# EAGLE board 5_8GHzRadar (EAGLE 9.6.2)
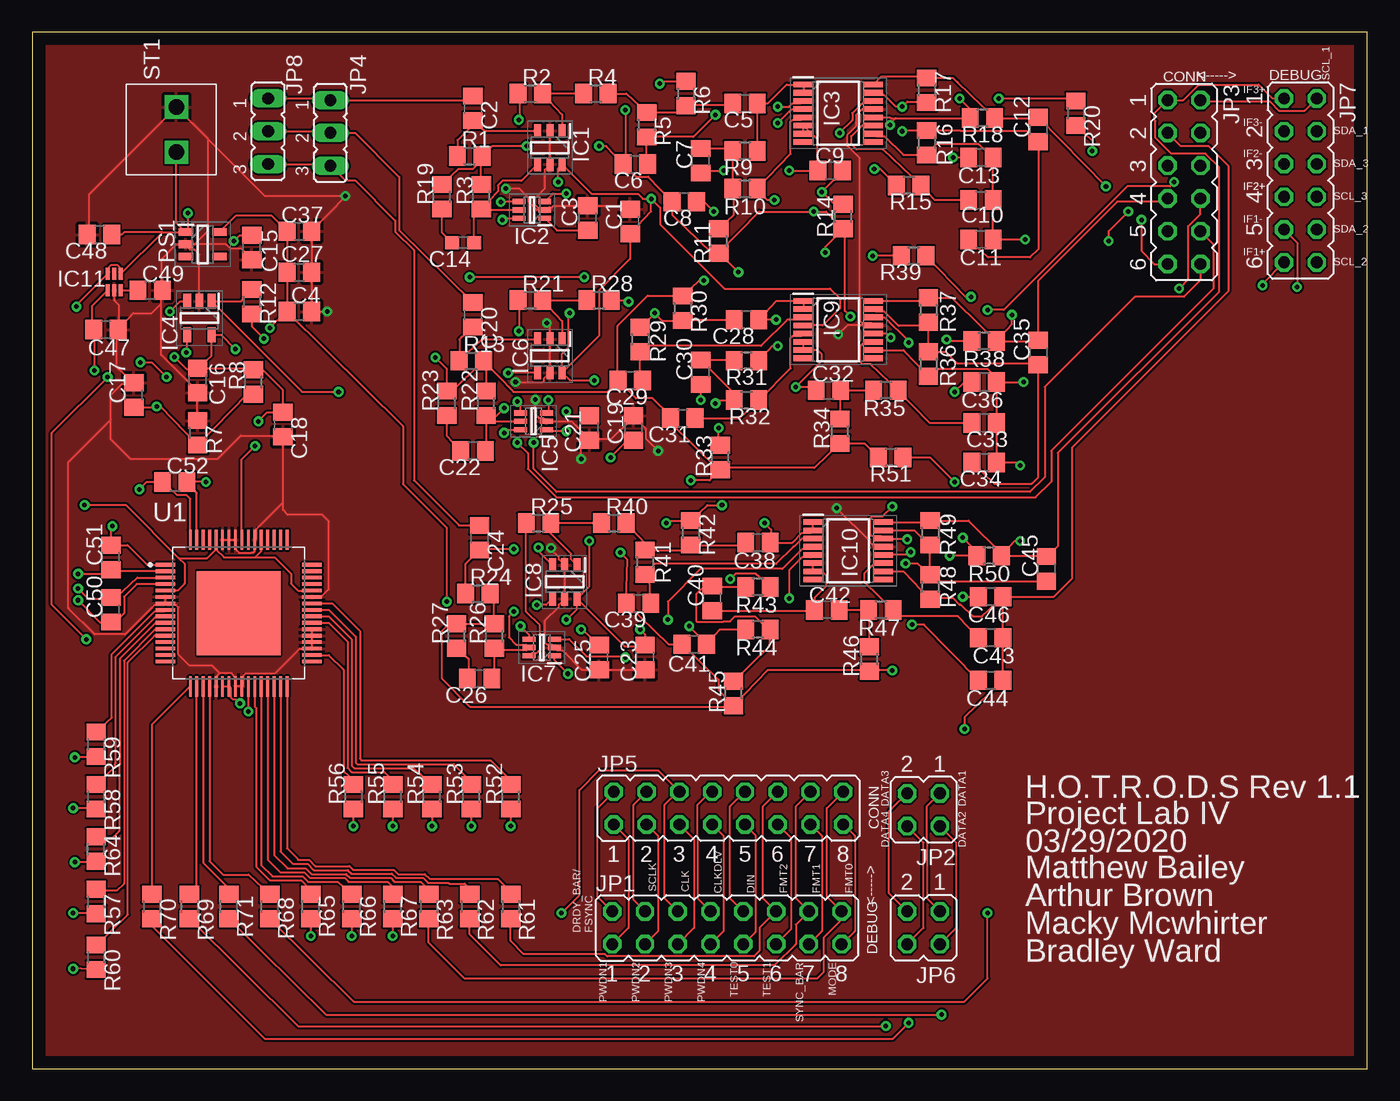
[diagram p0: board, top side]
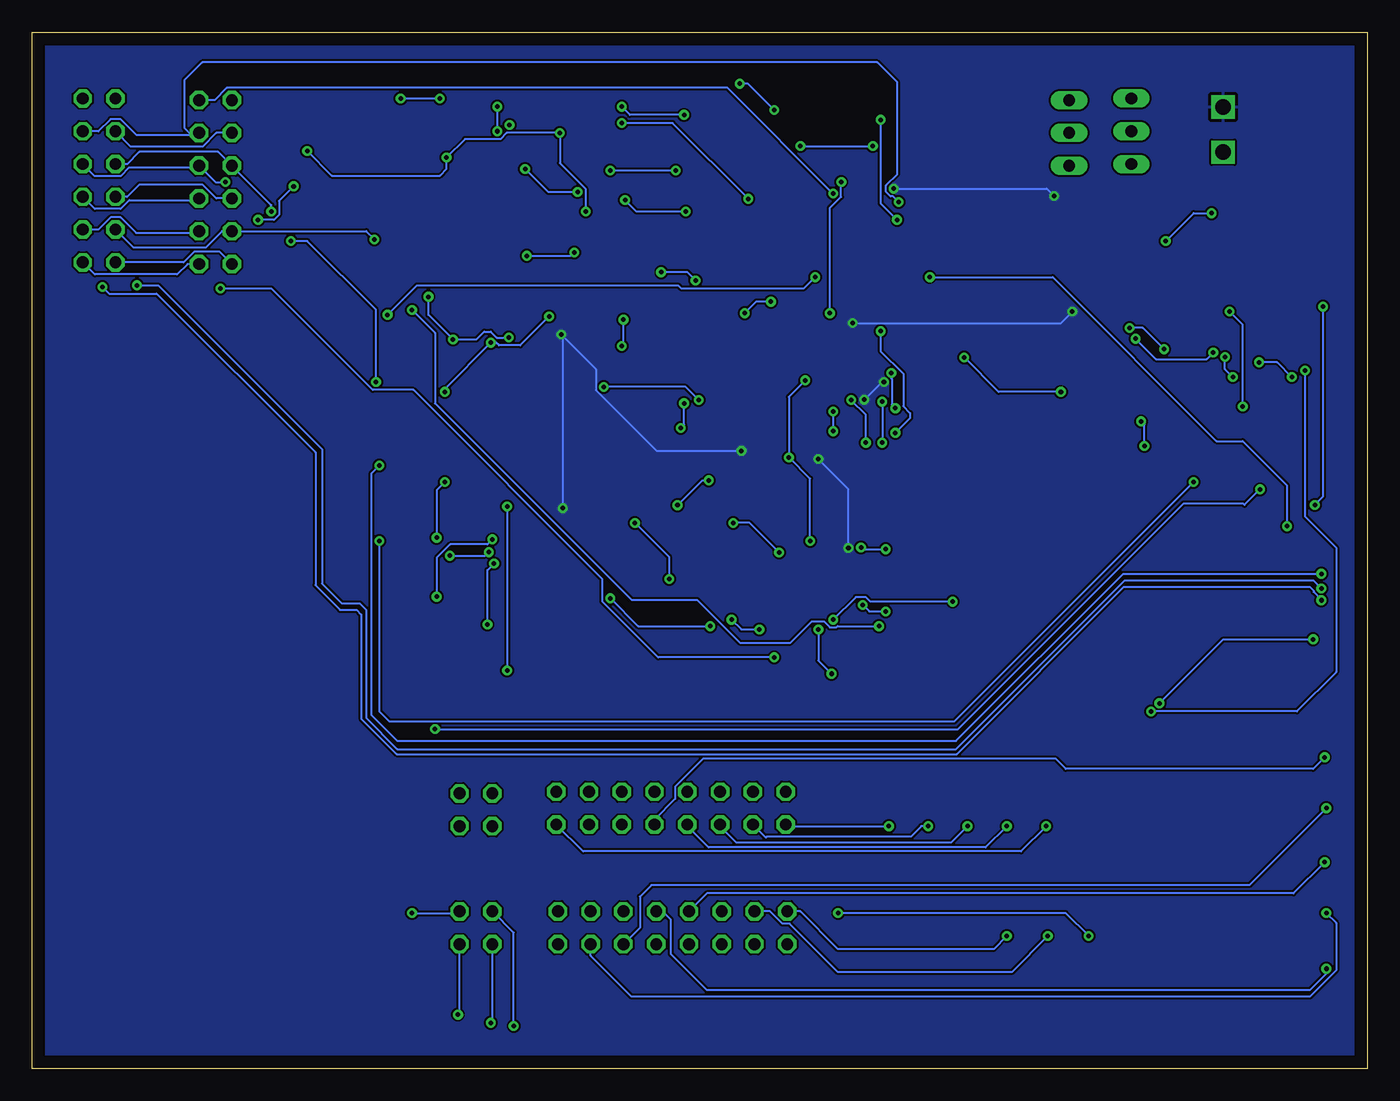
[diagram p1: board, bottom side, seen from below]

Size 103.48 x 80.31 mm. Coordinates in mm from the lower left corner, seen from the top.
Outline: 0,0 103.48,0 103.48,80.31 0,80.31 0,0
Copper layers (1*16): Top 0.035mm / dielectric 1.5mm / Bottom 0.035mm
Design rules "default": minimum track width 6mil, minimum drill 0.35mm, track to track 6mil, track to pad 6mil, pad to pad 6mil, via to via 6mil, smd to smd 6mil, copper to edge 40mil, drill to drill 6mil, minimum pad ring 10mil, minimum via ring 8mil, stop-mask expansion 4mil, vias tented up to drill 0mil, thermal gap 10mil

## Footprints (pad centres in the part's own frame; a part is rotated, then mirrored left to right if it is on the bottom)
C0805 = smd 1.3 x 1.5: 1 -0.95,0; 2 0.95,0
C0603 = smd 1.1 x 1: 1 -0.85,0; 2 0.85,0
SOT95P280X100-6N = smd 1.05 x 0.55: 1 -1.3,0.95; 2 -1.3,0; 3 -1.3,-0.95; 4 1.3,-0.95; 5 1.3,0; 6 1.3,0.95
SOT65P210X110-6N = smd 1 x 0.4: 1 -1,0.65; 2 -1,0; 3 -1,-0.65; 4 1,-0.65; 5 1,0; 6 1,0.65
SOP64P601X175-16N = smd 1.526 x 0.435: 1 -2.712,2.222; 2 -2.712,1.588; 3 -2.712,0.952; 4 -2.712,0.318; 5 -2.712,-0.318; 6 -2.712,-0.952; 7 -2.712,-1.588; 8 -2.712,-2.222; 9 2.712,-2.222; 10 2.712,-1.588; 11 2.712,-0.952; 12 2.712,-0.318; 13 2.712,0.318; 14 2.712,0.952; 15 2.712,1.588; 16 2.712,2.222
SOT95P280X145-5N = smd 1.15 x 0.6: 1 -1.3,0.95; 2 -1.3,0; 3 -1.3,-0.95; 4 1.3,-0.95; 5 1.3,0.95
SON50P150X150X80-6N = smd 0.914 x 0.305: 1 -0.635,0.508; 2 -0.635,0; 3 -0.635,-0.508; 4 0.635,-0.508; 5 0.635,0; 6 0.635,0.508
JP8Q = drill 0.914 octagon: 1 -8.89,-1.27; 2 -8.89,1.27; 3 -6.35,-1.27; 4 -6.35,1.27; 5 -3.81,-1.27; 6 -3.81,1.27; 7 -1.27,-1.27; 8 -1.27,1.27; 9 1.27,-1.27; 10 1.27,1.27; 11 3.81,-1.27; 12 3.81,1.27; 13 6.35,-1.27; 14 6.35,1.27; 15 8.89,-1.27; 16 8.89,1.27
JP2Q = drill 0.914 octagon: 1 -1.27,-1.27; 2 -1.27,1.27; 3 1.27,-1.27; 4 1.27,1.27
JP6Q = drill 0.914 octagon: 1 -6.35,-1.27; 2 -6.35,1.27; 3 -3.81,-1.27; 4 -3.81,1.27; 5 -1.27,-1.27; 6 -1.27,1.27; 7 1.27,-1.27; 8 1.27,1.27; 9 3.81,-1.27; 10 3.81,1.27; 11 6.35,-1.27; 12 6.35,1.27
JP2 = drill 0.914 long: 1 -2.54,0; 2 0,0; 3 2.54,0
R0805 = smd 1.3 x 1.5: 1 -0.95,0; 2 0.95,0
PHEONIX_SCREW(2) = drill 1.2 square: 1 -1.75,0; 2 1.75,0
QFP50P1200X1200X120-65N = smd 1.56 x 0.28: 1 -5.68,3.75; 2 -5.68,3.25; 3 -5.68,2.75; 4 -5.68,2.25; 5 -5.68,1.75; 6 -5.68,1.25; 7 -5.68,0.75; 8 -5.68,0.25; 9 -5.68,-0.25; 10 -5.68,-0.75; 11 -5.68,-1.25; 12 -5.68,-1.75; 13 -5.68,-2.25; 14 -5.68,-2.75; 15 -5.68,-3.25; 16 -5.68,-3.75; 33 5.68,-3.75; 34 5.68,-3.25; 35 5.68,-2.75; 36 5.68,-2.25; 37 5.68,-1.75; 38 5.68,-1.25; 39 5.68,-0.75; 40 5.68,-0.25; 41 5.68,0.25; 42 5.68,0.75; 43 5.68,1.25; 44 5.68,1.75; 45 5.68,2.25; 46 5.68,2.75; 47 5.68,3.25; 48 5.68,3.75 | smd 0.28 x 1.56: 17 -3.75,-5.68; 18 -3.25,-5.68; 19 -2.75,-5.68; 20 -2.25,-5.68; 21 -1.75,-5.68; 22 -1.25,-5.68; 23 -0.75,-5.68; 24 -0.25,-5.68; 25 0.25,-5.68; 26 0.75,-5.68; 27 1.25,-5.68; 28 1.75,-5.68; 29 2.25,-5.68; 30 2.75,-5.68; 31 3.25,-5.68; 32 3.75,-5.68; 49 3.75,5.68; 50 3.25,5.68; 51 2.75,5.68; 52 2.25,5.68; 53 1.75,5.68; 54 1.25,5.68; 55 0.75,5.68; 56 0.25,5.68; 57 -0.25,5.68; 58 -0.75,5.68; 59 -1.25,5.68; 60 -1.75,5.68; 61 -2.25,5.68; 62 -2.75,5.68; 63 -3.25,5.68; 64 -3.75,5.68 | smd 6.5 x 6.5: 65 0,0

## Placement (x,y rotation side)
C1  100n  [C0805]  46.35,65.66 90 top
C2  10u  [C0805]  34.16,74.42 270 top
C3  100n  [C0805]  43.05,65.91 90 top
C4  100n  [C0805]  20.7,58.67 0 top
C5  11n  [C0805]  55.24,74.8 180 top
C6  1.1n  [C0805]  46.74,70.1 180 top
C7  11n  [C0805]  51.82,70.36 90 top
C8  1.1n  [C0805]  50.55,67.18 180 top
C9  2.2u  [C0805]  61.85,69.6 0 top
C10  10p  [C0805]  73.53,67.31 0 top
C11  10p  [C0805]  73.53,64.26 180 top
C12  10p  [C0805]  77.98,72.77 90 top
C13  10p  [C0805]  73.53,70.61 180 top
C14  44u  [C0603]  33.4,64.01 180 top
C15  1u  [C0805]  17.02,63.63 270 top
C16  2.2u  [C0805]  12.83,53.34 270 top
C17  100n  [C0805]  7.87,52.2 90 top
C18  100n  [C0805]  19.43,49.91 270 top
C19  100n  [C0805]  46.61,49.66 90 top
C20  10u  [C0805]  34.16,58.42 270 top
C21  100n  [C0805]  43.18,49.66 270 top
C22  44u  [C0805]  34.16,47.88 180 top
C23  100n  [C0805]  47.5,31.88 270 top
C24  10u  [C0805]  34.67,41.15 270 top
C25  100n  [C0805]  43.94,31.88 270 top
C26  44u  [C0805]  34.67,30.23 180 top
C27  100n  [C0805]  20.7,61.72 0 top
C28  11n  [C0805]  55.37,58.04 180 top
C29  1.1n  [C0805]  46.35,53.34 180 top
C30  11n  [C0805]  51.82,53.97 90 top
C31  1.1n  [C0805]  50.42,50.42 180 top
C32  2.2u  [C0805]  61.72,52.58 0 top
C33  10p  [C0805]  73.79,50.04 0 top
C34  10p  [C0805]  73.79,46.99 180 top
C35  10p  [C0805]  77.98,55.5 90 top
C36  10p  [C0805]  73.79,53.21 180 top
C37  100n  [C0805]  20.7,64.9 0 top
C38  11n  [C0805]  56.26,40.77 180 top
C39  1.1n  [C0805]  46.99,36.07 180 top
C40  11n  [C0805]  52.7,36.45 90 top
C41  1.1n  [C0805]  51.31,32.89 180 top
C42  2.2u  [C0805]  61.59,35.56 0 top
C43  10p  [C0805]  74.3,33.4 0 top
C44  10p  [C0805]  74.3,30.1 180 top
C45  10p  [C0805]  78.61,38.73 90 top
C46  10p  [C0805]  74.3,36.58 180 top
C47  1u  [C0805]  5.71,57.28 0 top
C48  1u  [C0805]  5.21,64.64 180 top
C49  .01u  [C0805]  9.14,60.33 0 top
C50  2.2n  [C0805]  6.1,35.56 90 top
C51  2.2n  [C0805]  6.1,39.62 90 top
C52  2.2n  [C0805]  11.05,45.47 0 top
IC1  LT6230CS6#TRMPBF  [SOT95P280X100-6N]  40.13,71.37 270 top
IC2  MCP4017T-104E_LT  [SOT65P210X110-6N]  38.73,66.55 180 top
IC3  LTC6242HVCGN#PBF  [SOP64P601X175-16N]  62.48,74.04 0 top
IC4  TS461CLT  [SOT95P280X145-5N]  12.95,58.17 270 top
IC5  MCP4017T-104E_LT  [SOT65P210X110-6N]  38.86,50.16 180 top
IC6  LT6230CS6#TRMPBF  [SOT95P280X100-6N]  40.13,55.25 270 top
IC7  MCP4017T-104E_LT  [SOT65P210X110-6N]  39.5,32.64 180 top
IC8  LT6230CS6#TRMPBF  [SOT95P280X100-6N]  41.27,37.72 270 top
IC9  LTC6242HVCGN#PBF  [SOP64P601X175-16N]  62.48,57.28 0 top
IC10  LTC6242HVCGN#PBF  [SOP64P601X175-16N]  63.25,40.13 0 top
IC11  TPS717185DSER  [SON50P150X150X80-6N]  6.35,60.96 90 top
JP1  [JP8Q]  53.85,10.92 0 top
JP2  [JP2Q]  69.09,20.07 180 top
JP3  [JP6Q]  89.28,68.71 270 top
JP4  [JP2]  23.11,72.52 270 top
JP5  [JP8Q]  53.98,20.19 0 top
JP6  [JP2Q]  69.09,10.92 180 top
JP7  [JP6Q]  98.3,68.83 270 top
JP8  [JP2]  18.29,72.64 270 top
PS1  TPS70918DBVT  [SOT95P280X145-5N]  13.21,63.88 0 top
R1  4.7k  [R0805]  33.91,70.74 0 top
R2  1k  [R0805]  38.61,75.56 0 top
R3  1.5k  [R0805]  34.8,67.56 90 top
R4  1.61k  [R0805]  43.69,75.56 0 top
R5  5.77k  [R0805]  47.62,73.15 270 top
R6  NOP  [R0805]  50.67,75.56 270 top
R7  47k  [R0805]  12.83,49.28 270 top
R8  47k  [R0805]  17.14,53.21 90 top
R9  538  [R0805]  55.24,71.12 180 top
R10  17.3k  [R0805]  55.24,68.2 0 top
R11  NOP  [R0805]  53.21,64.13 90 top
R12  1k  [R0805]  17.02,59.44 270 top
R13  4.7k  [R0805]  34.04,54.86 0 top
R14  10k  [R0805]  62.87,66.04 90 top
R15  200k  [R0805]  67.94,68.45 180 top
R16  4.99k  [R0805]  69.34,71.75 270 top
R17  4.99k  [R0805]  69.34,75.82 270 top
R18  200k  [R0805]  73.66,73.66 180 top
R19  50  [R0805]  31.75,67.56 90 top
R20  NOP  [R0805]  80.9,74.04 270 top
R21  1k  [R0805]  38.61,59.56 0 top
R22  1.5k  [R0805]  35.18,51.56 90 top
R23  50  [R0805]  32.13,51.56 90 top
R24  4.7k  [R0805]  34.54,36.83 0 top
R25  1k  [R0805]  39.24,42.29 0 top
R26  1.5k  [R0805]  35.81,33.53 90 top
R27  50  [R0805]  32.89,33.53 90 top
R28  1.61k  [R0805]  43.94,59.56 0 top
R29  5.77k  [R0805]  47.12,56.52 270 top
R30  NOP  [R0805]  50.42,58.93 270 top
R31  538  [R0805]  55.37,54.86 180 top
R32  17.3k  [R0805]  55.37,51.82 0 top
R33  NOP  [R0805]  53.34,47.37 90 top
R34  10k  [R0805]  62.61,49.4 90 top
R35  200k  [R0805]  66.17,52.58 180 top
R36  4.99k  [R0805]  69.47,54.61 270 top
R37  4.99k  [R0805]  69.47,58.8 270 top
R38  200k  [R0805]  73.79,56.39 180 top
R39  NOP  [R0805]  68.33,62.99 180 top
R40  1.61k  [R0805]  45.09,42.29 0 top
R41  5.77k  [R0805]  47.5,39.24 270 top
R42  NOP  [R0805]  51.05,41.53 270 top
R43  538  [R0805]  56.26,37.34 180 top
R44  17.3k  [R0805]  56.26,34.04 180 top
R45  NOP  [R0805]  54.36,29.08 90 top
R46  10k  [R0805]  64.9,31.75 90 top
R47  200k  [R0805]  65.79,35.56 180 top
R48  4.99k  [R0805]  69.6,37.34 270 top
R49  4.99k  [R0805]  69.6,41.53 270 top
R50  200k  [R0805]  74.17,39.75 180 top
R51  NOP  [R0805]  66.55,47.37 180 top
R52  50  [R0805]  37.08,21.08 90 top
R53  50  [R0805]  34.04,21.08 90 top
R54  50  [R0805]  30.99,21.08 90 top
R55  50  [R0805]  27.94,21.08 90 top
R56  50  [R0805]  24.89,21.08 270 top
R57  50  [R0805]  4.95,12.95 270 top
R58  50  [R0805]  4.95,21.08 270 top
R59  50  [R0805]  4.95,25.15 270 top
R60  50  [R0805]  4.95,8.64 270 top
R61  50  [R0805]  37.08,12.57 270 top
R62  50  [R0805]  33.91,12.57 270 top
R63  50  [R0805]  30.73,12.57 270 top
R64  50  [R0805]  4.95,17.02 90 top
R65  50  [R0805]  21.59,12.57 90 top
R66  50  [R0805]  24.77,12.57 90 top
R67  50  [R0805]  27.94,12.57 90 top
R68  50  [R0805]  18.41,12.57 90 top
R69  50  [R0805]  12.19,12.57 270 top
R70  50  [R0805]  9.27,12.57 270 top
R71  50  [R0805]  15.24,12.57 90 top
ST1  PHOENIX_ST(2)  [PHEONIX_SCREW(2)]  11.18,72.77 90 top
U1  ADS1174IPAPT  [QFP50P1200X1200X120-65N]  16,35.31 0 top

## Library data of the parts
C1-C52 = rcl; SPICEPREFIX: C
IC1 IC6 IC8 = SamacSys_Parts; DESCRIPTION: LT6230 215MHz ULN SOT23 op amp Linear Technology LT6230CS6#TRMPBF Operational Amplifier, 200MHz Rail-Rail, 12 V, 5 V, 9 V, 6-Pin TSOT-23; HEIGHT: 1mm; MANUFACTURER_NAME: Linear Technology; MANUFACTURER_PART_NUMBER: LT6230CS6#TRMPBF; MOUSER_PART_NUMBER: 584-LT6230CS6#TRMPBF; MOUSER_PRICE-STOCK: https://www.mouser.com/Search/Refine.aspx?Keyword=584-LT6230CS6%23TRMPBF; RS_PART_NUMBER: 5061202P; RS_PRICE-STOCK: http://uk.rs-online.com/web/p/products/5061202P
IC2 IC5 IC7 = SamacSys_Parts; DESCRIPTION: MCP4017T-104E/LT, Digital Potentiometer 100k 128-Position Linear Serial-I2C 6-Pin SC-70; HEIGHT: 1.1mm; MANUFACTURER_NAME: Microchip; MANUFACTURER_PART_NUMBER: MCP4017T-104E/LT; MOUSER_PART_NUMBER: 579-MCP4017T104E/LT; MOUSER_PRICE-STOCK: https://www.mouser.com/Search/Refine.aspx?Keyword=579-MCP4017T104E%2FLT; RS_PART_NUMBER: 7386799P; RS_PRICE-STOCK: http://uk.rs-online.com/web/p/products/7386799P
IC3 IC9 IC10 = SamacSys_Parts; DESCRIPTION: LINEAR TECHNOLOGY - LTC6242HVCGN#PBF - IC, OP AMP, 18MHZ R/R, SMD, SSOP16; HEIGHT: 1.75mm; MANUFACTURER_NAME: Linear Technology; MANUFACTURER_PART_NUMBER: LTC6242HVCGN#PBF; MOUSER_PART_NUMBER: 584-LTC6242HVCGN#PBF; MOUSER_PRICE-STOCK: https://www.mouser.com/Search/Refine.aspx?Keyword=584-LTC6242HVCGN%23PBF
IC4 = SamacSys_Parts; ALLIED_NUMBER: 70521210; ALLIED_PRICE-STOCK: http://www.alliedelec.com/stmicroelectronics-ts461clt/70521210/; HEIGHT: 1.45mm; MANUFACTURER_NAME: STMicroelectronics; MANUFACTURER_PART_NUMBER: TS461CLT; MOUSER_PART_NUMBER: 511-TS461CL; MOUSER_PRICE-STOCK: https://www.mouser.com/Search/Refine.aspx?Keyword=511-TS461CL; RS_PART_NUMBER: 7958505P; RS_PRICE-STOCK: http://uk.rs-online.com/web/p/products/7958505P
IC11 = SamacSys_Parts; DESCRIPTION: 150mA, High PSRR, Low Quiescent Current, Low Noise LDO; HEIGHT: mm; MANUFACTURER_NAME: Texas Instruments; MANUFACTURER_PART_NUMBER: TPS717185DSER; MOUSER_PART_NUMBER: 595-TPS717185DSER; MOUSER_PRICE-STOCK: https://www.mouser.com/Search/Refine.aspx?Keyword=595-TPS717185DSER
JP1-JP8 = jumper
PS1 = SamacSys_Parts; DESCRIPTION: 150-mA 30-V ultra-low-Iq wide-input low-dropout (LDO) regulator with reverse current protection; HEIGHT: 1.45mm; MANUFACTURER_NAME: Texas Instruments; MANUFACTURER_PART_NUMBER: TPS70918DBVT; MOUSER_PART_NUMBER: 595-TPS70918DBVT; MOUSER_PRICE-STOCK: https://www.mouser.com/Search/Refine.aspx?Keyword=595-TPS70918DBVT; RS_PART_NUMBER: 8123849P; RS_PRICE-STOCK: http://uk.rs-online.com/web/p/products/8123849P
R1-R71 = rcl; SPICEPREFIX: R
ST1 = ProjectLab3GavinsParts
U1 = ADS1174IPAPT; AVAILABILITY: Unavailable; DESCRIPTION: 16 Bit Analog to Digital Converter 4 Input 1 Sigma-Delta 64-HTQFP _10x10_; MF: Texas Instruments; MP: ADS1174IPAPT; PACKAGE: HTQFP-64 Texas Instruments; PRICE: None

## Nets
0: C1.2 C3.2 C4.2 C15.2 C16.2 C17.2 C18.2 C19.2 C21.2 C23.2 C25.2 C27.2 C37.2 C47.2 C48.2 C49.2 IC1.2 IC1.5 IC2.2 IC3.13 IC4.2 IC5.2 IC6.2 IC6.5 IC7.2 IC8.2 IC8.5 IC9.13 IC10.13 IC11.2 PS1.2 R7.1 ST1.2 U1.6 U1.7 U1.21 U1.24 U1.25 U1.35 U1.36 U1.37 U1.38 U1.43 U1.54 U1.57 U1.58 U1.59
1V8: C47.1 IC11.1 U1.26
3V3A: C1.1 C4.1 C16.1 C18.1 C19.1 C23.1 C27.1 C37.1 IC1.6 IC3.4 IC4.5 IC6.6 IC8.6 IC9.4 IC10.4 PS1.5 R8.2 U1.22 U1.23 U1.56
5V: C15.1 C48.1 IC11.4 IC11.6 PS1.1 ST1.1 U1.5 U1.44 U1.53 U1.60
CLK: R65.2 U1.27
CLKDLV: R64.2 U1.10
DATA1: R68.2 U1.20
DATA2: R71.2 U1.19
DATA3: R69.1 U1.18
DATA4: R70.1 U1.17
DIN: R60.1 U1.12
DRDY_BAR/FSYNC: R67.2 U1.29
EXP_PAD: U1.65
FILTER1: C5.1 IC3.1 IC3.2 R9.1
FILTER2: C28.1 IC9.1 IC9.2 R31.1
FILTER3: C38.1 IC10.1 IC10.2 R43.1
FMT0: R61.1 U1.32
FMT1: R62.1 U1.31
FMT2: R63.1 U1.30
I2C_SCL_1: IC2.3 JP3.2 JP7.2
I2C_SCL_2: IC5.3 JP3.12 JP7.12
I2C_SCL_3: IC7.3 JP3.8 JP7.8
I2C_SDA_1: IC2.4 JP3.4 JP7.4
I2C_SDA_2: IC5.4 JP3.10 JP7.10
I2C_SDA_3: IC7.4 JP3.6 JP7.6
MODE: R56.1 U1.34
N$1: C14.1 IC1.4 IC2.5 R3.1
N$2: C2.2 IC1.3 R1.1
N$3: C5.2 R4.2 R5.1 R6.2
N$4: IC2.6 R2.1
N$5: C3.1 IC2.1
N$6: C9.2 R14.2 R15.2
N$7: C6.1 IC3.3 R5.2
N$8: C17.1 IC4.3 R7.2 R8.1
N$9: C7.2 R9.2 R10.1 R11.2
N$10: C22.1 IC5.5 IC6.4 R22.1
N$11: C8.1 IC3.5 R10.2
N$12: C7.1 C9.1 IC3.6 IC3.7
N$13: C10.1 IC3.11 R15.1
N$14: C14.2 R19.1
N$15: IC3.12 R18.2 R20.1
N$16: C20.2 IC6.3 R13.1
N$17: IC4.4 R12.2
N$18: C11.2 C12.1 IC3.15 R16.1 R17.2
N$19: IC5.6 R21.1
N$20: C21.1 IC5.1
N$21: C22.2 R23.1
N$22: C26.1 IC7.5 IC8.4 R26.1
N$23: C24.2 IC8.3 R24.1
N$24: IC7.6 R25.1
N$25: C25.1 IC7.1
N$26: C26.2 R27.1
N$27: C28.2 R28.2 R29.1 R30.2
N$28: C29.1 IC9.3 R29.2
N$29: C30.2 R31.2 R32.1 R33.2
N$30: C31.1 IC9.5 R32.2
N$31: C30.1 C32.1 IC9.6 IC9.7
N$32: C32.2 R34.2 R35.2
N$33: C33.1 IC9.11 R35.1
N$34: C34.2 C35.1 IC9.15 R36.1 R37.2
N$35: IC9.12 R38.2 R39.1
N$36: C38.2 R40.2 R41.1 R42.2
N$37: C39.1 IC10.3 R41.2
N$38: C40.2 R43.2 R44.1 R45.2
N$39: C41.1 IC10.5 R44.2
N$40: C40.1 C42.1 IC10.6 IC10.7
N$41: C42.2 R46.2 R47.2
N$42: C43.1 IC10.11 R47.1
N$43: C44.2 C45.1 IC10.15 R48.1 R49.2
N$44: IC10.12 R50.2 R51.1
N$45: JP1.1 JP5.1 R52.1
N$46: C49.1 IC11.3
N$47: JP1.3 JP5.3 R53.1
N$48: JP1.5 JP5.5 R54.1
N$49: JP1.7 JP5.7 R55.1
N$50: JP1.9 JP5.9 R59.2
N$51: JP1.15 JP5.15 R56.2
N$52: JP1.13 JP5.13 R57.2
N$53: JP1.11 JP5.11 R58.2
N$54: JP1.16 JP5.16 R63.2
N$55: JP1.10 JP5.10 R60.2
N$56: JP1.12 JP5.12 R61.2
N$57: JP1.14 JP5.14 R62.2
N$58: JP1.8 JP5.8 R64.1
N$59: JP1.6 JP5.6 R65.1
N$60: JP1.4 JP5.4 R66.1
N$61: JP1.2 JP5.2 R67.1
N$62: JP2.1 JP6.1 R68.1
N$63: JP2.3 JP6.3 R69.2
N$64: JP2.4 JP6.4 R70.2
N$65: JP2.2 JP6.2 R71.1
PWDN1: R52.2 U1.42
PWDN2: R53.2 U1.41
PWDN3: R54.2 U1.40
PWDN4: R55.2 U1.39
RX_1: C2.1 JP4.1 JP8.1
RX_1_IF+: C12.2 C50.2 IC3.16 JP3.11 JP7.11 R17.1 R18.1 U1.3
RX_1_IF-: C10.2 C11.1 C13.1 C50.1 IC3.10 JP3.9 JP7.9 R16.2 U1.4
RX_2: C20.1 JP4.2 JP8.2
RX_2_IF+: C35.2 C51.2 IC9.16 JP3.7 JP7.7 R37.1 R38.1 U1.1
RX_2_IF-: C33.2 C34.1 C36.1 C51.1 IC9.10 JP3.5 JP7.5 R36.2 U1.2
RX_3: C24.1 JP4.3 JP8.3
RX_3_IF+: C45.2 C52.2 IC10.16 JP3.1 JP7.1 R49.1 R50.1 U1.63
RX_3_IF-: C43.2 C44.1 C46.1 C52.1 IC10.10 JP3.3 JP7.3 R48.2 U1.64
SCLK: R66.2 U1.28
SYNC_BAR: R57.1 U1.11
TEST0: R59.1 U1.8
TEST1: R58.1 U1.9
VG: C6.2 C8.2 C13.2 C29.2 C31.2 C36.2 C39.2 C41.2 C46.2 IC3.14 IC4.1 IC9.14 IC10.14 R1.2 R3.2 R6.1 R11.1 R12.1 R13.2 R14.1 R19.2 R20.2 R22.2 R23.2 R24.2 R26.2 R27.2 R30.1 R33.1 R34.1 R39.2 R42.1 R45.1 R46.1 R51.2
VGA_OUT_RX_1: IC1.1 R2.2 R4.1
VGA_OUT_RX_2: IC6.1 R21.2 R28.1
VGA_OUT_RX_3: IC8.1 R25.2 R40.1

## Tracks (layer width: path | path; a pad name or v marks a point on that pad's centre or on a via)
0  (via drill 0.35)
  Top 0.152: IC1.2 IC1.5 39.73,69.68 39.73,68.22 38.88,67.37 38.88,67.03 39.36,66.55 IC2.2 | v39.88,57.78 40.13,57.53 IC6.2 IC6.5 39.69,53.5 39.69,53.33 39.55,53.19 38.81,53.19 38.79,53.21 v37.47,53.21 | v22.86,58.67 C4.2 C27.2 C37.2 v24.28,67.63 18.07,67.63 ST1.2 | v36.7,68.2 37.76,68.2 38.46,67.49 38.46,67.19 39.11,66.55 IC2.2 | C1.2 46.35,66.86 C3.2 40.42,66.86 40.33,66.77 40.08,66.77 39.86,66.55 IC2.2 | 43.14,48.85 41.82,50.16 IC5.2 39.64,50.39 39.27,50.39 38.99,50.66 v38.99,51.84 | 43.14,48.85 43.16,48.76 | 43.16,48.76 C21.2 | 46.6,50.57 46.56,50.46 44.87,48.76 43.16,48.76 | 46.6,50.57 C19.2 | v62.48,56.9 63.18,57.59 IC9.13 65.01,57.78 64.34,57.78 64.15,57.97 64.15,70.55 63.2,71.5 63.2,72.39 63.88,73.08 63.88,73.91 64.33,74.36 IC3.13 | v48.51,47.88 47.59,48.8 47.59,49.58 46.6,50.57 | C23.2 C25.2 42.58,30.93 41.09,32.42 40.72,32.42 IC7.2 40.28,32.86 39.9,32.86 39.77,32.99 39.77,34.74 40.83,35.8 40.83,35.97 IC8.5 IC8.2 40.83,39.47 40.83,39.64 40.22,40.25 v40.22,40.34 | v42.55,47.24 42.55,48.26 43.14,48.85 | v62.36,43.43 64.97,40.83 64.97,40.77 65.29,40.45 IC10.13 | 11.81,63.88 PS1.2 12.57,63.88 | 11.81,63.88 12.23,63.46 12.58,63.46 12.95,63.08 IC4.2 | ST1.2 13.59,72.11 13.59,64.9 12.57,63.88 | 11.81,63.88 11.18,63.88 9.99,62.7 9.99,60.42 C49.2 9.99,60.22 9.99,59.27 | IC11.2 6.35,59.56 6.7,59.21 6.7,57.31 | 6.7,57.31 C47.2 6.57,57.18 6.57,54.36 C17.2 6.95,53.05 6.1,52.2 6.1,50.29 | 6.7,57.31 7.83,58.55 9.27,58.55 9.99,59.27 | C15.2 16.22,63.53 15.37,63.53 15.02,63.88 12.57,63.88 | C16.2 12.78,52.53 | 12.78,52.53 9.99,55.32 9.99,59.27 | R7.1 12.78,50.17 12.78,52.53
  Top 0.152: 14.54,30.64 14.25,30.35 U1.21 | 14.54,30.64 15.47,30.64 15.75,30.35 U1.24 U1.25 16.38,29.76 16.38,30.48 16.54,30.64 18.82,30.64 20.75,32.56 U1.35 U1.36 U1.37 U1.38 | U1.6 U1.7 | U1.59 U1.58 U1.57 15.75,40.25 16.03,39.98 16.97,39.98 16.99,40 17.14,40 17.25,40.11 U1.54 17.38,41.12 17.38,41.84 19.43,43.89 | 6.1,50.29 6.1,48.77 7.62,47.24 14.35,47.24 16.17,49.06 19.33,49.06 C18.2 19.43,43.89 | U1.43 22.41,36.56 22.99,37.14 22.99,42.42 22.48,42.93 19.81,42.93 19.43,43.31 19.43,43.89 | 14.54,30.64 13.93,31.24 12.19,31.24 11.33,32.1 11.33,35.77 11.18,35.92 10.45,35.92 U1.7 | U1.7 10.19,35.92 9.47,35.92 7.2,33.66 4.83,33.66 2.79,35.69 2.79,46.99 6.1,50.29 | C48.2 4.4,64.78 4.4,67.74 ST1.2
  Bottom 0.152: v39.88,57.78 23.75,57.78 v22.86,58.67 | v36.7,68.2 24.85,68.2 v24.28,67.63 | v38.99,51.84 37.62,53.21 v37.47,53.21 | v48.51,47.88 55.09,47.88 59.79,52.58 59.79,54.2 v62.48,56.9 62.36,56.77 v62.36,43.43 | v40.22,40.34 40.22,44.91 v42.55,47.24
  pour Top: -0.13,80.77 103.89,80.77 103.89,-0.38 103.76,-0.51 -0.38,-0.51 -0.38,80.64 -0.38,80.77
  pour Bottom: -0.25,80.77 -0.38,80.77 -0.38,-0.51 103.89,-0.51 103.89,80.77 -0.13,80.77
1V8  (via drill 0.35)
  Top 0.152: IC11.1 4.61,59.09 4.61,57.49 C47.1 4.83,57.22 v4.83,54.1 | v16.76,27.69 16.76,29.61 U1.26
  Bottom 0.152: v4.83,54.1 4.83,42.8 2.41,40.39 2.41,30.73 5.46,27.69 v16.76,27.69
3V3A  (via drill 0.35)
  Top 0.152: v47.98,67.41 47.98,66.43 C1.1 46.35,62.75 43.94,60.33 43.94,56.8 IC6.6 | v57.78,73.28 58.75,74.24 58.78,74.24 58.9,74.36 IC3.4 | IC6.6 41.69,53.34 v43.56,53.34 | v44.83,47.37 46.27,48.81 C19.1 | IC6.6 41.08,55.42 41.59,55.92 41.59,58.48 v41.66,58.55 | v40.77,68.71 40.77,69.76 IC1.6 43.36,67.8 46.95,67.8 47.34,67.41 v47.98,67.41 | v47.98,67.41 48.66,66.72 48.66,65.44 53.66,60.45 61.85,60.45 62.61,59.69 62.61,58.93 61.28,57.59 IC9.4 | C4.1 C27.1 C37.1 18.55,66.1 15.78,66.1 PS1.5 | C4.1 28.74,49.78 28.74,45.3 32.13,41.91 v32.13,36.2 | v41.4,34.8 42.23,35.62 IC8.6 | IC8.6 45.92,32.73 47.4,32.73 C23.1 47.5,33.66 v47.12,34.04 | IC8.6 43.18,37.37 v43.18,40.89 | IC10.4 60.34,40.26 59.68,40.26 58.15,38.73 51.82,38.73 49.28,36.2 v49.28,34.8 | v15.75,55.75 14.63,56.87 IC4.5 13.9,55.27 C16.1 | v18.41,57.4 19.68,58.67 C4.1 | 17.12,54.08 R8.2 | 17.12,54.08 17.93,54.08 19.43,52.58 C18.1 18.22,50.86 v17.53,50.16 | U1.56 16.25,47.24 v17.27,48.26 | U1.22 U1.23 15.38,29.5 15.38,28.77 15.54,28.62 15.81,28.62 v16.11,28.32 | v4.19,33.27 1.52,35.94 1.52,49.28 v5.84,53.59 | v8.38,54.74 9.27,54.74 v10.41,53.59 | v11.03,55.15 11.98,54.19 C16.1 | C16.1 16.92,54.29 17.12,54.08
  Bottom 0.152: v47.98,67.41 53.85,73.28 v57.78,73.28 | v43.56,53.34 44.83,52.07 v44.83,47.37 43.18,45.72 v43.18,40.89 | v41.66,58.55 41.66,66.71 40.8,67.57 40.8,68.68 v40.77,68.71 | v32.13,36.2 38.51,36.2 38.87,36.55 39.65,36.55 v41.4,34.8 | v49.28,34.8 48.51,34.04 v47.12,34.04 | v15.75,55.75 17.4,57.4 v18.41,57.4 | v17.27,48.26 17.27,49.91 v17.53,50.16 | v16.11,28.32 11.15,33.27 v4.19,33.27 | v5.84,53.59 6.99,54.74 v8.38,54.74 | v10.41,53.59 11.03,54.21 v11.03,55.15
5V  (via drill 0.35)
  Top 0.152: PS1.1 11.18,65.56 ST1.1 | 10.09,64.83 IC11.4 6.73,61.72 6.73,62.15 6.6,62.28 6.1,62.28 5.97,62.15 5.97,61.72 IC11.6 3.43,59.18 v3.43,59.05 | 10.09,64.83 PS1.1 | 10.09,64.83 7.13,64.83 6.95,64.64 C48.1 | v12.06,66.29 12.06,64.99 PS1.1 | v4.06,43.69 7.24,43.69 11.37,39.56 | 11.37,39.56 11.81,39.12 11.81,37.59 11.28,37.06 U1.5 | 11.37,39.56 13.55,39.56 14.25,40.26 U1.60 14.25,40.23 14.86,39.62 17.27,39.62 | U1.53 17.75,40.1 17.27,39.62 | 17.27,39.62 18.8,39.62 20.07,38.35 20.07,37.59 20.6,37.06 U1.44 | C15.1 16.06,64.58 v15.62,64.13
  Bottom 0.152: v15.62,64.13 13.46,66.29 v12.06,66.29 | v3.43,59.05 3.43,44.32 v4.06,43.69
CLK
  Top 0.152: U1.27 17.25,28.06 17.37,27.94 17.37,15.65 18.41,14.61 20.83,14.61 21.59,13.84 R65.2
CLKDLV
  Top 0.152: U1.10 9.59,34.56 6.78,31.75 6.78,23.58 6.73,23.53 6.73,18.42 6.18,17.87 5.05,17.87 R64.2
DATA1
  Top 0.152: U1.20 13.75,16.09 14.8,15.05 16.77,15.05 R68.2
DATA2
  Top 0.152: U1.19 13.25,15.96 15.24,13.97 R71.2
DATA3
  Top 0.152: R69.1 12.75,13.98 U1.18
DATA4
  Top 0.152: U1.17 9.27,26.64 R70.1
DIN
  Top 0.152: U1.12 9.48,33.56 7.42,31.5 7.42,11.95 R60.1
DRDY_BAR/FSYNC
  Top 0.152: U1.29 18.25,16.19 19.23,15.21 21.08,15.21 21.51,14.78 24.21,14.78 24.51,14.48 27.56,14.48 27.94,14.1 R67.2
FILTER1
  Top 0.152: IC3.2 IC3.1 58.48,76.26 57.02,74.8 C5.1 R9.1
FILTER2  (via drill 0.35)
  Top 0.152: IC9.2 IC9.1 57.68,59.5 C28.1 v57.66,58.04 | R31.1 57.37,56.01 v57.78,56.01
  Bottom 0.152: v57.78,56.01 57.66,56.13 v57.66,58.04
FILTER3  (via drill 0.35)
  Top 0.152: C38.1 57.28,40.77 | 57.28,40.77 58.91,40.77 59.68,41.53 60.34,41.53 IC10.2 IC10.1 | v54.1,37.95 54.53,38.37 56.05,38.37 R43.1 | 57.28,40.77 57.28,41.78 v56.77,42.29
  Bottom 0.152: v54.1,37.95 54.1,39.62 v56.77,42.29
FMT0
  Top 0.152: U1.32 19.75,17.08 20.57,16.26 20.57,16.18 21.46,16.18 21.95,15.7 24.59,15.7 24.86,15.42 28.02,15.42 28.35,15.09 30.43,15.09 30.81,14.71 36.09,14.71 37.28,13.52 R61.1
FMT1
  Top 0.152: U1.31 19.25,16.82 20.19,15.88 21.34,15.88 21.82,15.39 24.46,15.39 24.74,15.11 27.86,15.11 28.19,14.78 30.3,14.78 30.68,14.41 32.27,14.41 32.32,14.35 33.53,14.35 33.91,13.97 R62.1
FMT2
  Top 0.152: U1.30 18.75,16.55 19.79,15.52 21.21,15.52 21.64,15.09 24.33,15.09 24.64,14.78 27.76,14.78 28.07,14.48 30.1,14.48 30.73,13.84 R63.1
I2C_SCL_1  (via drill 0.35)
  Top 0.152: IC2.3 40.35,67.82 v41.4,67.82 | JP3.2 90.68,74.93 95.95,74.93 96.64,74.24 98.63,74.24 JP7.2
  Bottom 0.152: JP3.2 89.34,75.06 88.4,76 49.58,76 v41.4,67.82
I2C_SCL_2  (via drill 0.35)
  Top 0.152: JP3.12 90.55,61.09 89.28,59.82 85.47,59.82 78.49,52.83 78.49,45.85 77.34,44.7 40.64,44.7 38.86,46.48 v38.86,48.51 | v40.01,51.82 40.01,50.96 IC5.3
  Bottom 0.152: v38.86,48.51 38.86,50.67 v40.01,51.82 | JP3.12 91.45,62.36 92.26,61.54 98.63,61.54 JP7.12
I2C_SCL_3  (via drill 0.35)
  Top 0.152: v45.97,31.88 45.9,31.95 42.97,31.95 41.63,33.29 IC7.3 | v88.9,60.45 89.61,61.16 89.61,65.29 90.55,66.23 JP3.8
  Bottom 0.152: JP3.8 90.68,67.31 95.95,67.31 96.64,66.62 98.63,66.62 JP7.8 | v45.97,31.88 54.96,31.88 59.28,36.2 59.28,37.95 73.94,52.61 77.09,52.61 84.93,60.45 v88.9,60.45
I2C_SDA_1  (via drill 0.35)
  Top 0.152: IC2.4 36.37,67.2 v36.32,67.16
  Bottom 0.152: v36.32,67.16 36.76,67.59 36.95,67.59 37.31,67.95 37.31,68.45 36.43,69.33 36.43,76.44 37.97,77.98 90.3,77.98 91.69,76.58 91.69,72.9 91.31,72.52 JP3.4 90.68,72.39 95.44,72.39 96.64,73.58 97.42,73.58 98.36,72.64 JP7.4
I2C_SDA_2  (via drill 0.35)
  Top 0.152: IC5.4 37.86,51.42 v37.59,51.69 | v37.59,48.51 38.43,47.68 38.43,46.48 40.64,44.27 77.78,44.27 78.99,45.49 78.99,47.88 91.57,60.45 91.57,63.88 JP3.10
  Bottom 0.152: v37.59,51.69 v37.59,48.51 | JP3.10 90.68,64.77 95.44,64.77 96.64,65.96 97.42,65.96 98.36,65.02 JP7.10
I2C_SDA_3  (via drill 0.35)
  Top 0.152: v88.52,68.71 88.19,68.38 84.88,68.38 75.3,58.8 v74.04,58.8 | v37.85,34.29 38.5,33.64 IC7.4
  Bottom 0.152: JP7.6 98.63,69.16 96.64,69.16 95.95,69.85 90.68,69.85 JP3.6 89.28,68.71 v88.52,68.71 | v74.04,58.8 72.26,57.02 72.26,51.56 57.02,36.32 51.94,36.32 48.64,33.02 44.7,33.02 43.05,34.67 42.13,34.67 41.65,34.19 41.15,34.19 41.05,34.29 v37.85,34.29
MODE
  Top 0.152: U1.34 22.99,32.06 24.13,30.91 24.13,23.06 24.89,22.4 R56.1
N$1
  Top 0.152: R3.1 34.96,66.55 IC2.5 | C14.1 34.25,66.17 R3.1 | IC1.4 37.91,68.81 36.45,68.81 36.1,68.45 36.1,68.01 R3.1
N$2
  Top 0.152: IC1.3 35.06,72.67 C2.2 34.16,73.15 32.96,71.95 R1.1
N$3
  Top 0.152: R4.2 46.06,75.56 R5.1 50.28,74.1 50.8,74.62 R6.2 50.77,74.72 54.31,74.72 C5.2
N$4  (via drill 0.35)
  Top 0.152: v37.72,73.53 37.76,73.57 37.76,75.47 R2.1 | v36.45,65.79 36.56,65.9 IC2.6
  Bottom 0.152: v37.72,73.53 37.72,67.06 v36.45,65.79
N$5
  Top 0.152: C3.1 40.67,64.96 IC2.1
N$6  (via drill 0.35)
  Top 0.152: R15.2 65.72,69.72 v65.28,69.72 | C9.2 62.8,69.52 62.15,68.87 62.14,68.87 v61.21,67.94 62.22,66.94 R14.2
  Bottom 0.152: v65.28,69.72 63.5,67.94 v61.21,67.94
N$7  (via drill 0.35)
  Top 0.152: IC3.3 59.58,74.8 58.91,74.8 58.66,74.55 v57.78,74.55 | 47.59,72.26 R5.2 | R5.2 51.25,72.2 v52.96,73.91 | C6.1 47.62,70.16 R5.2
  Bottom 0.152: v52.96,73.91 57.15,73.91 v57.78,74.55
N$8  (via drill 0.35)
  Top 0.152: v10.67,58.67 11.46,59.47 IC4.3 | R8.1 16.7,52.31 R7.2 9.97,51.31 v9.65,51.31 9.61,51.35 9.51,51.25 C17.1
  Bottom 0.152: v9.65,51.31 9.65,57.66 v10.67,58.67
N$9
  Top 0.152: 54.31,71.21 R9.2 | R9.2 R10.1 54.4,68.1 54.4,66.17 54.31,66.09 R11.2 | C7.2 54.11,71.31 R9.2
N$10  (via drill 0.35)
  Top 0.152: 35.23,50.57 R22.1 35.18,48.05 C22.1 | 35.23,50.57 35.73,50.16 IC5.5 | IC6.4 36.91,53.94 v36.89,53.92 | 35.23,50.57 35.97,50.57 v36.58,51.18
  Bottom 0.152: v36.89,53.92 36.89,53.49 36.86,53.46 36.86,51.46 v36.58,51.18
N$11  (via drill 0.35)
  Top 0.152: IC3.5 59.58,73.53 58.91,73.53 58.78,73.4 58.78,70.88 R10.2 56.98,67.31 v57.53,67.31 | C8.1 52.07,67.18 v52.83,66.42
  Bottom 0.152: v52.83,66.42 56.64,66.42 v57.53,67.31
N$12  (via drill 0.35)
  Top 0.152: IC3.7 IC3.6 60.6,72.27 60.63,72.27 60.83,72.06 60.83,69.6 | v58.67,69.6 60.83,69.6 | 60.83,69.6 C9.1 | C7.1 52,69.6 v53.59,69.6
  Bottom 0.152: v53.59,69.6 v58.67,69.6
N$13
  Top 0.152: C10.1 69.99,67.31 R15.1 65.93,71.25 63.88,71.25 63.5,71.63 63.5,72.26 64.33,73.09 IC3.11
N$14
  Top 0.152: R19.1 31.75,64.81 C14.2
N$15  (via drill 0.35)
  Top 0.152: 66.93,73.66 66.53,73.66 66.47,73.72 IC3.12 | 66.93,73.66 R18.2 72.81,74.26 v71.88,75.18 | 66.93,73.66 66.49,73.22 v66.49,73.12 | v74.93,75.18 80.71,75.18 R20.1
  Bottom 0.152: v74.93,75.18 v71.88,75.18
N$16
  Top 0.152: C20.2 33.19,56.59 33.11,56.52 33.11,54.89 | R13.1 33.11,54.89 | 33.11,54.89 34.87,56.55 IC6.3
N$17  (via drill 0.35)
  Top 0.152: R12.2 17.02,57.52 v17.96,56.57 | v11.94,55.5 12,55.56 IC4.4
  Bottom 0.152: v17.96,56.57 16.38,54.99 12.45,54.99 v11.94,55.5
N$18  (via drill 0.35)
  Top 0.152: C12.1 77.98,71.75 | 77.98,71.75 77.98,63.5 77.34,62.86 74.08,62.86 C11.2 | IC3.15 65.39,75.44 66.05,75.44 66.94,74.55 v67.44,74.55 67.84,74.95 69.26,74.95 R17.2 | v67.44,72.64 67.5,72.7 R16.1 71.94,72.7 71.97,72.68 77.05,72.68 77.98,71.75
  Bottom 0.152: v67.44,74.55 v67.44,72.64
N$19  (via drill 0.35)
  Top 0.152: R21.1 37.72,59.52 v37.72,57.15 | v36.58,49.28 36.81,49.52 IC5.6
  Bottom 0.152: v37.72,57.15 37.72,55.61 35.97,53.86 35.97,51.34 35.43,50.8 35.43,50.42 v36.58,49.28
N$20  (via drill 0.35)
  Top 0.152: v41.4,50.93 41.82,50.51 43.08,50.51 C21.1 | v41.4,49.4 39.97,49.4 IC5.1
  Bottom 0.152: v41.4,50.93 v41.4,49.4
N$21
  Top 0.152: R23.1 32.13,49.06 C22.2
N$22  (via drill 0.35)
  Top 0.152: IC8.4 39.85,35.94 v39.12,35.94 | v37.34,35.43 36.96,35.05 36.96,33.42 37.52,32.86 38.28,32.86 IC7.5 38.28,32.42 36.07,32.42 R26.1 35.81,30.42 C26.1
  Bottom 0.152: v39.12,35.94 38.61,35.43 v37.34,35.43
N$23  (via drill 0.35)
  Top 0.152: IC8.3 39.24,40.1 v39.24,40.39 | v37.34,40.26 34.67,40.26 34.65,40.28 C24.2 33.59,39.12 R24.1
  Bottom 0.152: v39.24,40.39 39.12,40.26 v37.34,40.26
N$24
  Top 0.152: IC7.6 38.72,32.21 39.09,32.21 39.35,32.47 39.35,34.35 38.29,35.41 R25.1
N$25  (via drill 0.35)
  Top 0.152: C25.1 42.63,34.04 v42.55,34.04 | v41.53,30.61 40.5,31.64 IC7.1
  Bottom 0.152: v42.55,34.04 42.55,31.62 v41.53,30.61
N$26
  Top 0.152: R27.1 33.82,31.75 33.82,30.33 C26.2
N$27  (via drill 0.35)
  Top 0.152: R28.2 46.1,59.56 v46.23,59.44 | R29.1 47.18,57.47 v48.26,58.55 48.83,57.98 R30.2 50.46,58.04 C28.2
  Bottom 0.152: v46.23,59.44 47.37,59.44 v48.26,58.55
N$28
  Top 0.152: IC9.3 59.58,58.04 58.53,58.04 56.5,56.01 47.62,56.01 47.12,55.5 | C29.1 47.12,53.43 47.12,55.5 | 47.12,55.5 R29.2
N$29  (via drill 0.35)
  Top 0.152: R33.2 53.21,48.35 v53.21,49.66 | v52.96,51.56 53.21,51.82 R32.1 54.42,52.32 C30.2 54.36,54.92 R31.2
  Bottom 0.152: v53.21,49.66 52.96,49.91 v52.96,51.56
N$30
  Top 0.152: C31.1 54.83,50.42 R32.2 58.78,54.27 58.78,56.64 58.91,56.77 59.58,56.77 IC9.5
N$31  (via drill 0.35)
  Top 0.152: C30.1 v51.82,51.82 | C32.1 60.62,52.83 v59.18,52.83 61.21,54.86 61.21,55.37 60.9,55.69 IC9.7 IC9.6
  Bottom 0.152: v51.82,51.82 52.83,52.83 v59.18,52.83
N$32
  Top 0.152: R35.2 C32.2 62.61,52.54 R34.2
N$33
  Top 0.152: C33.1 69.56,50.04 R35.1 64.99,54.61 64.34,54.61 64.2,54.74 64.2,56 64.53,56.33 IC9.11
N$34
  Top 0.152: IC9.15 65.39,58.67 66.05,58.67 67.16,57.57 69.19,57.57 R37.2 R36.1 70.81,55.56 71.69,54.67 77.79,54.67 77.98,54.48 | C34.2 74.59,45.34 77.47,45.34 77.98,45.85 77.98,54.48 | 77.98,54.48 C35.1
N$35  (via drill 0.35)
  Top 0.152: R38.2 70.99,56.39 v70.87,56.52 | v66.55,56.66 66.25,56.96 IC9.12 | v72.77,59.82 72.35,59.82 R39.1
  Bottom 0.152: v66.55,56.66 67.48,56.66 67.95,57.12 68.45,57.12 69.06,56.52 v70.87,56.52 72.77,58.42 v72.77,59.82
N$36
  Top 0.152: R40.2 47.5,40.73 R41.1 50.67,40.19 R42.2 55.12,40.58 C38.2
N$37
  Top 0.152: C39.1 47.84,38.05 R41.2 48.22,39.12 57.66,39.12 59,40.46 59.04,40.46 59.66,41.08 IC10.3
N$38
  Top 0.152: R43.2 52.74,37.34 C40.2 52.12,37.4 51.47,36.75 51.47,34.69 51.54,34.62 53.55,34.62 53.6,34.67 54.1,34.67 54.48,35.05 56.02,35.05 57.04,34.04 R44.1 57.11,32.69 R45.2
N$39  (via drill 0.35)
  Top 0.152: R44.2 53.3,34.04 C41.1 52.25,32.97 v50.93,34.29 | IC10.5 60.35,39.63 59.68,39.63 58.67,38.62 v58.67,36.45
  Bottom 0.152: v58.67,36.45 56.52,34.29 v50.93,34.29
N$40
  Top 0.152: IC10.6 IC10.7 61.2,38.54 61.53,38.22 61.53,37.4 60.65,36.52 C42.1 60.58,35.5 C40.1
N$41
  Top 0.152: C42.2 R47.2 64.9,35.52 R46.2
N$42
  Top 0.152: IC10.11 65.29,39.18 64.52,38.41 64.52,37.68 R47.1 67.24,35.05 71.77,35.05 C43.1
N$43  (via drill 0.35)
  Top 0.152: C44.2 69.13,34.42 v68.2,34.42 | v67.69,39.15 68.63,39.15 R48.1 | R48.1 69.6,40.51 | 69.6,40.51 R49.2 | IC10.15 68.39,41.72 69.6,40.51 | R48.1 70.1,37.78 C45.1
  Bottom 0.152: v68.2,34.42 68.2,38.64 v67.69,39.15
N$44  (via drill 0.35)
  Top 0.152: v71.12,39.75 R50.2 73.28,39.75 73.28,40 v72.14,41.15 | v68.1,40.03 67.88,39.81 IC10.12 | R51.1 69.6,47.37 v71.5,45.47
  Bottom 0.152: v71.12,39.75 68.38,39.75 v68.1,40.03 | v71.5,45.47 72.14,44.83 v72.14,41.15
N$45  (via drill 0.35)
  Top 0.152: JP5.1 46.23,17.78 46.23,10.92 JP1.1 | R52.1 v37.08,18.8
  Bottom 0.152: JP5.1 44.96,18.8 v37.08,18.8
N$46
  Top 0.152: IC11.3 C49.1
N$47  (via drill 0.35)
  Top 0.152: JP5.3 48.51,18.03 48.51,10.67 JP1.3 | R53.1 v34.04,18.8
  Bottom 0.152: v34.04,18.8 34.58,18.8 35.39,17.98 46.53,17.98 46.61,17.91 JP5.3
N$48  (via drill 0.35)
  Top 0.152: JP5.5 51.31,17.78 51.31,10.92 JP1.5 | R54.1 v30.99,18.8
  Bottom 0.152: v30.99,18.8 32.26,17.53 48.9,17.53 50.16,18.8 JP5.5
N$49  (via drill 0.35)
  Top 0.152: JP5.7 53.59,18.03 53.59,10.67 JP1.7 | R55.1 v27.94,18.8
  Bottom 0.152: v27.94,18.8 29.59,17.14 51.05,17.14 52.7,18.8 JP5.7
N$50  (via drill 0.35)
  Top 0.152: JP5.9 56.06,18.11 56.06,10.59 JP1.9 | R59.2 4.91,24.13 v3.3,24.13
  Bottom 0.152: v3.3,24.13 4.19,23.24 23.37,23.24 24.13,24 51.49,24 53.65,21.85 53.65,20.9 55.24,19.3 JP5.9
N$51  (via drill 0.35)
  Top 0.152: JP5.15 63.75,18.03 63.75,10.67 JP1.15 | R56.2 v24.89,18.8
  Bottom 0.152: v24.89,18.8 26.85,16.84 60.78,16.84 JP5.15
N$52  (via drill 0.35)
  Top 0.152: JP5.13 61.21,18.03 61.21,10.67 JP1.13 | R57.2 4.91,12.07 v3.17,12.07
  Bottom 0.152: v3.17,12.07 2.41,11.3 2.41,7.62 4.45,5.59 57.02,5.59 60.2,8.76 JP1.13
N$53  (via drill 0.35)
  Top 0.152: JP5.11 58.8,17.91 58.8,10.8 JP1.11 | R58.2 4.91,20.19 v3.17,20.19
  Bottom 0.152: v3.17,20.19 9.14,14.22 55.5,14.22 56.39,13.34 56.39,10.92 JP1.11
N$54
  Top 0.152: JP5.16 61.59,20.19 61.59,13.34 JP1.16 62.74,11.56 61.34,10.16 61.34,7.49 60.83,6.99 33.53,6.99 30.73,9.78 R63.2
N$55  (via drill 0.35)
  Top 0.152: JP1.10 54.1,13.21 54.1,20.32 JP5.10 | R60.2 3.21,7.79 v3.17,7.75
  Bottom 0.152: v3.17,7.75 3.17,7.37 4.45,6.1 51.18,6.1 53.98,8.89 53.98,11.56 54.61,12.19 JP1.10
N$56
  Top 0.152: JP5.12 56.64,20.32 56.64,13.21 JP1.12 56.39,10.92 56.39,9.14 55.96,8.71 44.57,8.71 44.39,8.89 38.1,8.89 37.08,9.91 R61.2
N$57
  Top 0.152: JP5.14 59.18,20.32 59.18,13.21 JP1.14 59.18,11.18 59.18,9.65 57.53,8 36.32,8 33.91,10.41 R62.2
N$58  (via drill 0.35)
  Top 0.152: JP1.8 51.61,13.16 51.61,17.91 51.56,17.96 51.56,20.45 52.58,21.46 JP5.8 | R64.1 4.79,16 v3.3,16
  Bottom 0.152: v3.3,16 5.71,13.59 51.18,13.59 JP1.8
N$59  (via drill 0.35)
  Top 0.152: JP1.6 49.02,13.21 49.02,20.45 50.04,21.46 JP5.6 48.51,23.11 43.94,23.11 42.42,21.59 42.42,13.46 v41.02,12.07 | R65.1 v21.59,10.29
  Bottom 0.152: v21.59,10.29 23.37,12.07 v41.02,12.07
N$60  (via drill 0.35)
  Top 0.152: JP1.4 46.61,13.08 46.61,20.45 JP5.4 | R66.1 v24.77,10.29
  Bottom 0.152: v24.77,10.29 27.56,7.49 41.02,7.49 44.78,11.25 45.35,11.25 46.29,12.19 JP1.4
N$61  (via drill 0.35)
  Top 0.152: JP1.2 43.81,13.34 43.81,20.19 JP5.2 | R67.1 v27.94,10.29
  Bottom 0.152: v27.94,10.29 28.96,9.27 41.02,9.27 43.94,12.19 JP1.2
N$62  (via drill 0.35)
  Top 0.152: JP6.1 69.39,13.16 69.39,17.65 69.34,17.7 69.34,20.32 JP2.1 | R68.1 24.93,5.21 72.26,5.21 74.04,6.99 v74.04,12.07
  Bottom 0.152: v74.04,12.07 70.48,12.07 JP6.1
N$63  (via drill 0.35)
  Top 0.152: JP6.3 66.42,13.59 66.42,19.94 JP2.3 | R69.2 20.61,3.3 v66.17,3.3
  Bottom 0.152: v66.17,3.3 66.17,10.54 JP6.3
N$64  (via drill 0.35)
  Top 0.152: JP6.4 69.09,10.92 69.09,17.53 JP2.4 | R70.2 9.27,11.09 18.07,2.29 66.67,2.29 v67.94,3.56
  Bottom 0.152: v67.94,3.56 67.82,3.68 JP6.4
N$65  (via drill 0.35)
  Top 0.152: JP6.2 71.63,10.92 71.63,17.53 JP2.2 | R71.1 22.77,4.19 v70.48,4.19
  Bottom 0.152: v70.48,4.19 70.36,4.32 JP6.2
PWDN1
  Top 0.152: R52.2 37.08,22.35 35.53,23.9 25.53,23.9 25.4,24.03 25.4,33.91 23.25,36.06 U1.42
PWDN2
  Top 0.152: U1.41 22.99,35.56 25.07,33.48 25.07,23.7 25.17,23.6 32.66,23.6 34.04,22.22 R53.2
PWDN3
  Top 0.152: U1.40 22.98,35.06 24.77,33.27 24.77,23.5 24.97,23.29 29.55,23.29 R54.2
PWDN4
  Top 0.152: U1.39 22.98,34.56 24.43,33.1 24.43,23.32 24.77,22.99 27.3,22.99 27.94,22.35 R55.2
RX_1
  Top 0.152: C2.1 33.95,75.06 JP4.1 22.99,75.18 JP8.1
RX_1_IF+  (via drill 0.35)
  Top 0.152: IC3.16 65.83,76.9 69.21,76.9 R17.1 71.4,76.77 71.72,76.45 R18.1 77.94,73.66 C12.2 v83.22,68.38 | v85.98,65.79 85.98,63.37 87,62.36 JP3.11 | U1.3 8.15,38.06 6.49,36.51 C50.2 6.01,36.42 4.34,36.42 v3.56,37.21 | JP7.11 95.38,60.83 v95.38,60.71
  Bottom 0.152: v83.22,68.38 84.36,67.24 84.36,66.17 84.74,65.79 v85.98,65.79 | JP7.11 91.75,62.48 90.94,63.3 88.95,63.3 JP3.11 | v95.38,60.71 93.73,60.71 81.03,48.01 81.03,37.59 79.5,36.07 78.11,36.07 77.6,35.56 77.6,27.18 75.18,24.77 31.88,24.77 18.8,37.85 4.19,37.85 v3.56,37.21
RX_1_IF-  (via drill 0.35)
  Top 0.152: IC3.10 65.38,72.27 66.05,72.27 67.51,70.8 R16.2 70.06,71.63 73.37,71.63 C13.1 C10.2 C11.1 v76.96,64.26 | U1.4 8.09,37.56 7.11,36.58 7.11,35.31 6.47,34.67 C50.1 5.25,34.61 v3.56,36.3 | JP7.9 98.04,64.01 v98.04,60.58
  Bottom 0.152: v76.96,64.26 77.6,64.9 JP3.9 88.77,64.9 90.04,63.63 95.63,63.63 JP7.9 | v98.04,60.58 97.54,60.07 93.85,60.07 81.53,47.75 81.53,37.47 79.63,35.56 78.36,35.56 77.98,35.18 77.98,27.13 75.23,24.38 31.83,24.38 18.87,37.34 4.45,37.34 4.16,37.06 4.16,36.96 3.56,36.35 v3.56,36.3
RX_2
  Top 0.152: C20.1 28.45,64.98 28.45,69.09 25.02,72.52 JP4.2 22.99,72.64 JP8.2
RX_2_IF+  (via drill 0.35)
  Top 0.152: IC9.16 69.02,59.5 R37.1 71.27,59.75 71.75,59.27 R38.1 | R38.1 77.94,56.39 C35.2 77.98,61.05 84.11,67.18 87.76,67.18 JP3.7 | U1.1 8.91,39.06 7.39,40.57 C51.2 6.1,41.91 v6.22,42.04 | R38.1 75.95,57.7 v75.95,58.42 | v42.8,61.34 v33.91,61.34
  Bottom 0.152: JP3.7 89.22,67.44 90.29,68.5 95.19,68.5 96.13,67.56 JP7.7 | v75.95,58.42 73.66,60.71 53.44,60.71 53.21,60.48 43.66,60.48 v42.8,61.34 | v33.91,61.34 24.38,61.34 11.68,48.64 9.65,48.64 6.22,45.21 v6.22,42.04
RX_2_IF-  (via drill 0.35)
  Top 0.152: IC9.10 67.54,55.69 R36.2 69.94,54.23 74.04,54.23 74.64,53.63 C36.1 | C36.1 C33.2 C34.1 76.33,46.99 v76.58,46.74 | C36.1 v76.83,53.21 | v83.44,64.13 83.44,64.9 v84.96,66.42 | U1.2 6.18,38.56 C51.1 5.95,38.35 v3.56,38.35
  Bottom 0.152: v76.83,53.21 76.83,58.8 82.17,64.13 v83.44,64.13 | v84.96,66.42 84.96,66.93 JP3.5 89.08,71.04 95.19,71.04 96.13,70.1 JP7.5 | v76.58,46.74 77.22,46.1 77.22,27.43 75.18,25.4 31.88,25.4 18.92,38.35 v3.56,38.35
RX_3
  Top 0.152: JP8.3 22.99,70.1 JP4.3 24.26,68.83 25.02,68.83 28.14,65.71 28.14,64.86 29.59,63.41 29.59,45.59 33.09,42.1 C24.1
RX_3_IF+  (via drill 0.35)
  Top 0.152: IC10.16 69.57,42.35 R49.1 72.58,42.48 75.21,39.85 | JP7.1 96.13,75.18 95.06,76.25 90.42,76.25 89.22,75.06 JP3.1 87,74.04 87,73.53 87.07,73.46 87.07,72.13 88.28,70.92 90.94,70.92 92,69.86 92,60.21 79.5,47.71 79.5,40.47 C45.2 78.45,39.75 R50.1 75.21,39.85 | U1.63 12.75,44.61 C52.2 v13.46,45.47 | 75.21,39.85 76.16,40.89 v76.58,40.89
  Bottom 0.152: v76.58,40.89 76.58,27.69 75.82,26.92 32,26.92 v13.46,45.47
RX_3_IF-  (via drill 0.35)
  Top 0.152: IC10.10 67.54,38.54 R48.2 69.7,36.49 71.37,36.49 71.89,35.97 71.98,35.97 72.9,35.05 73.62,35.05 C46.1 | C46.1 C43.2 C44.1 72.26,27.22 v72.26,26.32 | C46.1 79.21,36.58 80.61,37.97 80.61,48.13 92.71,60.24 92.71,69.98 91.19,71.5 89.03,71.5 JP3.3 | U1.64 12.25,44.16 11.96,44.45 11.25,44.45 C52.1 8.89,45.47 v8.32,44.89
  Bottom 0.152: JP3.3 89.22,72.52 90.29,71.45 95.83,71.45 JP7.3 | v72.26,26.32 31.72,26.32 14.22,43.81 9.65,43.81 9.53,43.69 v8.32,44.89
SCLK
  Top 0.152: U1.28 17.75,15.78 18.62,14.91 20.95,14.91 21.39,14.48 23.67,14.48 R66.2
SYNC_BAR
  Top 0.152: U1.11 9.54,34.06 7.11,31.62 7.11,14.35 6.57,13.8 5.05,13.8 R57.1
TEST0
  Top 0.152: U1.8 10.19,35.42 9.47,35.42 6.17,32.13 6.17,27.21 R59.1
TEST1
  Top 0.152: U1.9 9.6,35.05 6.48,31.93 6.48,23.71 6.43,23.66 6.43,23.41 R58.1
VG  (via drill 0.35)
  Top 0.152: R19.2 33.06,69.72 34.16,69.72 34.76,70.32 | 34.76,70.32 34.76,70.61 | R1.2 34.76,70.61 | 34.76,70.32 34.76,68.45 R3.2 | 45.75,70.14 C6.2 45.83,70.1 46.81,69.12 47.74,69.12 C8.2 49.6,66.19 52.68,63.19 R11.1 | 45.75,70.14 44.49,71.5 v43.94,71.5 | v38.33,71.5 35.65,71.5 34.76,70.61 | R13.2 35.18,54.57 R22.2 | R13.2 32.43,52.41 R23.2 32.13,54.23 v31.24,55.12 | R13.2 37.3,52.45 44.59,52.45 C29.2 | C29.2 46.8,51.94 48.08,51.94 49.47,50.6 C31.2 49.47,50.05 53.19,46.42 R33.1 | IC9.14 66.07,58.23 67.94,56.35 v67.94,56.26 | v71.5,52.45 72.26,53.21 C36.2 | IC3.14 65.01,74.8 64.34,74.8 63.58,74.04 63.58,73.5 v62.59,72.52 | v71.37,70.61 C13.2 | v63.42,58.29 62.99,58.72 62.99,64.96 R14.1 | R11.1 56.35,66.42 v60.58,66.42 61.53,66.42 R14.1 | v52.07,61.09 51.73,61.09 R30.1 50.39,59.91 47.71,59.91 45.38,57.57 45.38,53.37 C29.2 | v54.74,61.72 53.21,63.25 R11.1 | R24.2 35.81,36.41 R26.2 R27.2 32.3,34.48 31.73,33.91 31.73,30.24 33.91,28.07 54.19,28.07 R45.1 | R45.1 54.36,28.18 53.2,29.34 53.2,30.14 C41.2 49.31,32.89 C39.2 46.14,39.46 v45.59,40 | v53.47,43.67 52.34,43.67 R42.1 49.34,42.48 v49.15,42.29 | R33.1 52.51,45.59 v51.05,45.59 | R45.1 57.02,30.9 64.8,30.9 R46.1 64.94,30.86 v66.67,30.86 | v67.82,41.02 67.75,41.08 IC10.14 65.77,41.27 65.1,41.27 64.97,41.41 64.97,42.67 65.1,42.8 65.91,42.8 v66.67,43.56 | v72.14,36.58 C46.2 | v23.75,52.45 20.92,52.45 IC4.1 16.2,59.47 R12.1 | R20.2 82.17,71.92 v82.17,71.12 | R39.2 v65.15,62.99 | R33.1 53.48,46.56 60.63,46.56 60.69,46.63 R34.1 64.52,48.45 R51.2 | v48.64,76.33 48.83,76.52 R6.1 | v45.97,74.3 45.97,70.36 45.75,70.14 | v61.47,63.25 61.47,63.69 R14.1
  Bottom 0.152: v45.97,74.3 48.01,76.33 v48.64,76.33 | v43.94,71.5 v38.33,71.5 | v71.5,52.45 71.5,52.7 v67.94,56.26 67.52,56.26 67.31,56.05 65.66,56.05 v63.42,58.29 | v60.58,66.42 60.61,66.45 60.61,68.2 62.59,70.18 v62.59,72.52 66.71,72.52 67.19,72.04 69.95,72.04 v71.37,70.61 71.37,69.72 71.88,69.22 80.26,69.22 v82.17,71.12 | v52.07,61.09 52.7,61.72 v54.74,61.72 | v53.47,43.67 51.54,45.59 v51.05,45.59 | v45.59,40 47.88,42.29 v49.15,42.29 | v67.82,41.02 68.2,40.64 71.09,40.64 72.14,39.59 v72.14,36.58 | v66.67,43.56 v66.67,30.86 | v23.75,52.45 28.57,52.45 v31.24,55.12 | v65.15,62.99 61.72,62.99 v61.47,63.25
VGA_OUT_RX_1
  Top 0.152: IC1.1 41.08,73.94 R2.2 R4.1
VGA_OUT_RX_2
  Top 0.152: IC6.1 41.08,57.94 R21.2 R28.1
VGA_OUT_RX_3
  Top 0.152: IC8.1 41.78,39.47 41.78,39.89 40.19,41.48 R25.2 R40.1

## Text on the board
tNames: CONN | <-----> | DEBUG | SCL_1 | IF3+ | IF3- | SDA_1 | IF2- | SDA_3 | IF2+ | IF2+ | SCL_3 | IF1- | SDA_2 | IF1+ | SCL_2 | H.O.T.R.O.D.S Rev 1.1 | DATA3 | DATA1 | Project Lab IV | CONN | DATA4 | DATA2 | 03/29/2020 | Matthew Bailey | SCLK | CLK | CLKDLV | DIN | FMT2 | FMT1 | FMT0 | <-----> | Arthur Brown | DRDY_BAR/ / FSYNC | Macky Mcwhirter | DEBUG | PWDN1 | PWDN2 | PWDN3 | PWDN4 | TEST0 | TEST1 | SYNC_BAR | MODE | Bradley Ward